# Altium PCB PCB_VS1005BOB-Pico-LCD_2024-02-10.pcbdoc
Units mil, origin at the board's own origin, x right, y up, seen from the top; angles counter-clockwise.
Board outline 5177.86 x 5854.5 mil, 2 copper layers (Top Layer, Bottom Layer); 38 components, 131 nets, 661 pads, 78 vias.
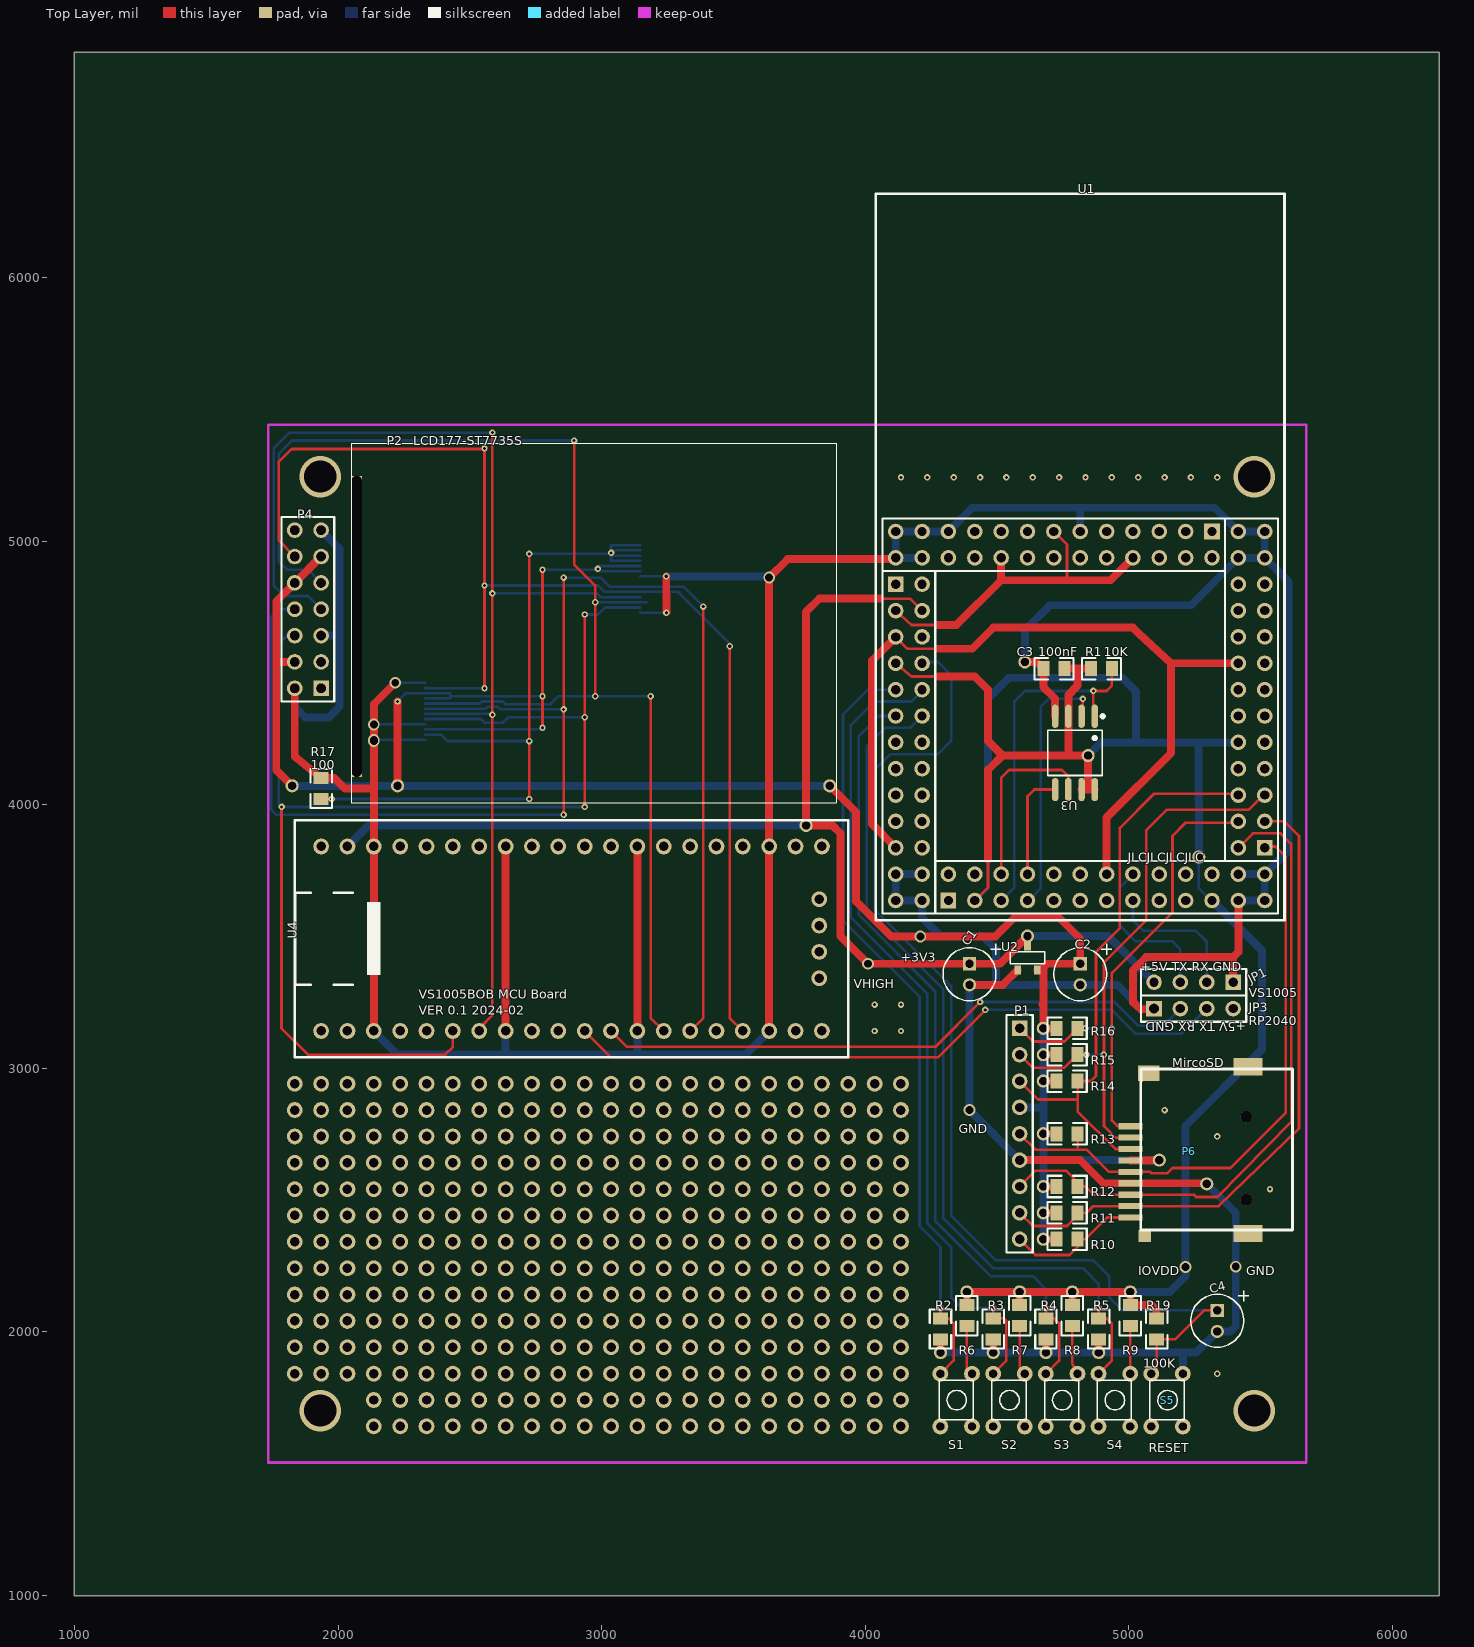
[diagram p0: Top Layer view]
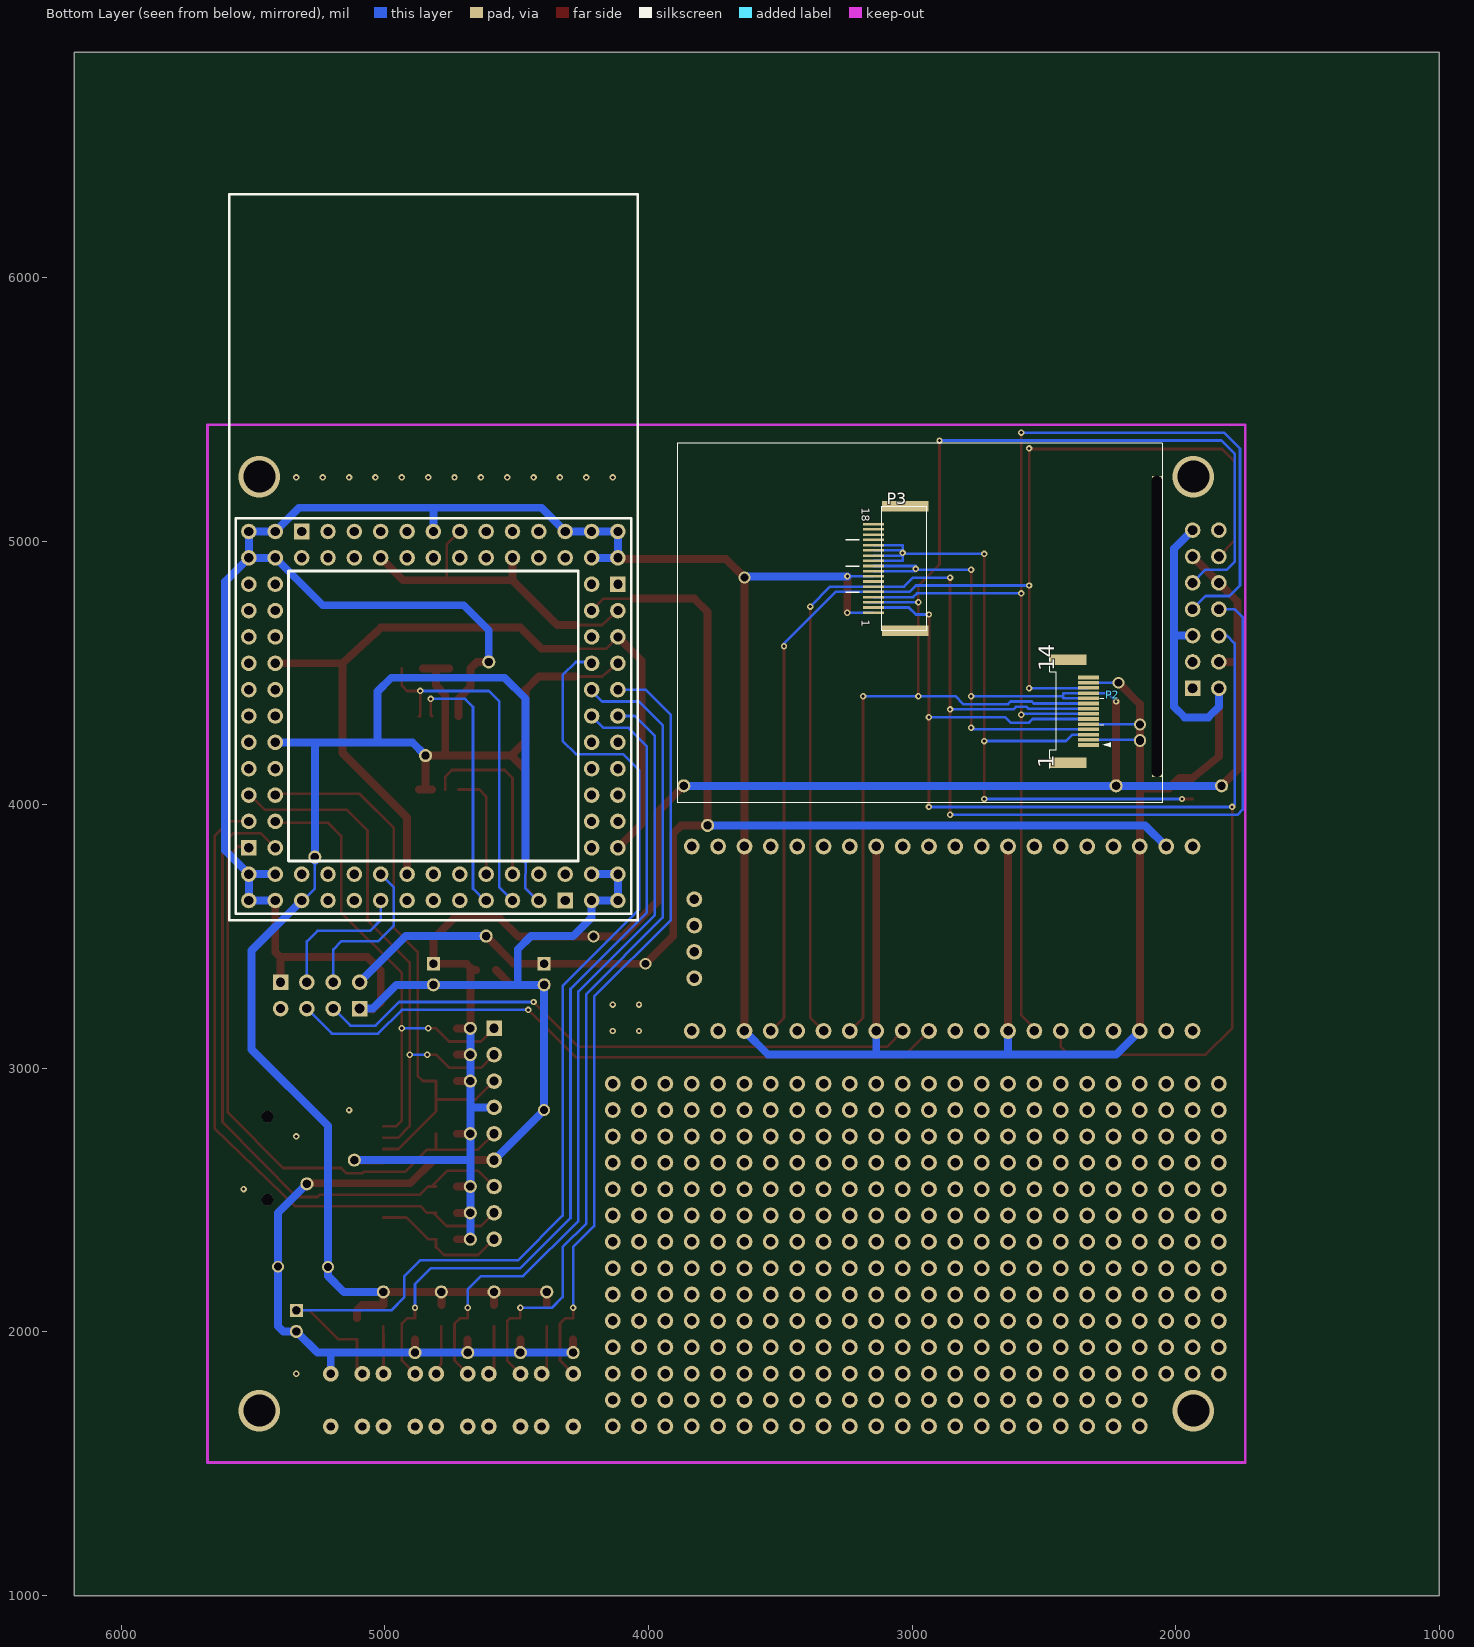
[diagram p1: Bottom Layer view, seen from below]

## Layer stack, top to bottom
Top Layer: signal copper (thickness not stored)
Dielectric: dielectric 12.6, FR-4, Dk 4.8
Bottom Layer: signal copper (thickness not stored)

## Board outline
6177.86,1000 1000,1000 1000,6854.5 6177.86,6854.5

## Components (designator, comment, footprint, x,y, rotation, side; value= is the part's Value field where it differs from the comment)
C1 "10uF" CAP-DIP 4395.86,3357 r270 top
C2 "10uF" CAP-DIP 4815.86,3357 r270 top
C3 "100nF" CAP-0805 4715.86,4517 r180 top
C4 "1uF" CAP-DIP 5335.86,2042 r270 top
JP1 "UART_VS10XX" HDR1X4#1 5395.86,3327 r180 top
JP3 "UART_PICO" HDR1X4#2 5095.86,3227 r0 top
P1 "Header 9" HDR1X9 4585.86,3152 r270 top
P2 "LCD177-ST7735S" LCD177-ST7735S 2435.86,4992 r270 top
P3 "LCD28-ST7789-HDR2X7" FPC18 3185.86,4642 r0 bottom
P4 "Header 7X2" HDR2X7 1935.86,4442 r90 top
P6 "MircoSD" MICROSD 5445.86,2502 r0 top
R1 "10K" RES-0805 4895.86,4517 r180 top
R2 "10K" RES-0805 4285.86,2012 r90 top
R3 "10K" RES-0805 4485.86,2012 r90 top
R4 "10K" RES-0805 4685.86,2012 r90 top
R5 "10K" RES-0805 4885.86,2012 r90 top
R6 "10K" RES-0805 4385.86,2062 r90 top
R7 "10K" RES-0805 4585.86,2062 r90 top
R8 "10K" RES-0805 4785.86,2062 r90 top
R9 "10K" RES-0805 5005.86,2062 r90 top
R10 "10K" RES-0805 4765.86,2352 r180 top
R11 "10K" RES-0805 4765.86,2452 r180 top
R12 "10K" RES-0805 4765.86,2552 r180 top
R13 "10K" RES-0805 4765.86,2752 r180 top
R14 "10K" RES-0805 4765.86,2952 r180 top
R15 "10K" RES-0805 4765.86,3052 r180 top
R16 "10K" RES-0805 4765.86,3152 r180 top
R17 "100" RES-0805 1935.86,4062 r270 top
R19 "100K" RES-0805 5105.86,2012 r90 top
S1 "UP" SW-4.5 4405.86,1842 r180 top
S2 "DOWN" SW-4.5 4605.86,1842 r180 top
S3 "D2" SW-4.5 4805.86,1842 r180 top
S4 "D3" SW-4.5 5005.86,1842 r180 top
S5 "RESET" SW-4.5 5205.86,1842 r180 top
U1 "VS1005BOB" VS1005BOB 4815.86,4337 r0 top
U2 "VOX6206" VOX6206 4615.86,3452 r0 top
U3 "GD25Q16CSIG" SOIC-8_L5.3-W5.3-P1.27-LS8.0-BL 4795.86,4197 r180 top
U4 "YD_RP2040" YD-RP2040 3435.86,3492 r90 top

## Footprints (in the part's own frame and the unit in brackets; to place one, negate y for a bottom-side part, rotate by r counter-clockwise, add the part's x,y. Pads: shape width x height; smd on the part's side, far side on the other; paste and mask are expansions set on the pad)
CAP-0805 [mm]
  rect 1.16x1.45 smd paste+0 mask+0.102: 1(-1.016,0) 2(1.016,0)
  silkscreen extent -1.9,-1.03 1.87,1.04
CAP-DIP [mil]
  rect 50x50 hole 30 slot 30.2 at 0 deg paste+0 mask+2: 1(-40,0)
  round 50 hole 30 slot 30.2 at 0 deg paste+0 mask+2: 2(40,0)
  silkscreen extent -115,-100 100,120
FPC18 [mm]
  rect 4.5x1.016 smd paste+0 mask+0.051: 0(-4.064,-12.446) 0(-4.064,-0.459)
  rect 2x0.25 smd paste+0 mask+0.051: 1(-1.004,-2.209) 2(-1.004,-2.709) 3(-1.004,-3.209) 4(-1.004,-3.709) 5(-1.004,-4.209) 6(-1.004,-4.709) 7(-1.004,-5.209) 8(-1.004,-5.709) 9(-1.004,-6.209) 10(-1.004,-6.709) 11(-1.004,-7.209) 12(-1.004,-7.709) 13(-1.004,-8.209) 14(-1.004,-8.709) 15(-1.004,-9.217) 16(-1.004,-9.725) 17(-1.004,-10.233) 18(-1.004,-10.741)
  silkscreen extent -6.07,-12.45 1.65,-0.46
HDR1X4#1 [mm]
  rect 1.5x1.5 hole 0.9 paste+0 mask+0.051: 1(0,0)
  round 1.5 hole 0.9 paste+0 mask+0.051: 2(2.54,0) 3(5.08,0) 4(7.62,0)
  silkscreen extent -1.27,-1.27 8.89,1.27
HDR1X4#2 [mm]
  rect 1.5x1.5 hole 0.9 slot 0.905 at 0 deg paste+0 mask+0.051: 1(0,0)
  round 1.5 hole 0.9 paste+0 mask+0.051: 2(2.54,0) 3(5.08,0) 4(7.62,0)
  silkscreen extent -1.27,-1.27 8.89,1.27
HDR1X9 [mm]
  rect 1.5x1.5 hole 0.9 paste+0 mask+0.051: 1(0,0)
  round 1.5 hole 0.9 paste+0 mask+0.051: 2(2.54,0) 3(5.08,0) 4(7.62,0) 5(10.16,0) 6(12.7,0) 7(15.24,0) 8(17.78,0) 9(20.32,0)
  silkscreen extent -1.27,-1.27 21.59,1.27
HDR2X7 [mm]
  rect 1.5x1.5 hole 0.9 slot 0.905 at 0 deg paste+0 mask+0.051: 1(0,0)
  round 1.5 hole 0.9 slot 0.905 at 0 deg paste+0 mask+0.051: 2(0,2.54) 3(2.54,0) 4(2.54,2.54) 5(5.08,0) 6(5.08,2.54) 7(7.62,0) 8(7.62,2.54) 9(10.16,0) 10(10.16,2.54) 11(12.7,0) 12(12.7,2.54) 13(15.24,0) 14(15.24,2.54)
  silkscreen extent -1.27,-1.27 16.51,3.81
LCD177-ST7735S [mm]
  rect 0.35x2 smd far side paste+0 mask+0.051: 1(19.431,-2.67) 2(18.931,-2.67) 3(18.431,-2.67) 4(17.931,-2.67) 5(17.431,-2.67) 6(16.931,-2.67) 7(16.431,-2.67) 8(15.931,-2.67) 9(15.431,-2.67) 10(14.931,-2.67) 11(14.431,-2.67) 12(13.931,-2.67) 13(13.431,-2.67) 14(12.931,-2.67)
  rect 1x3.5 smd far side paste+0 mask+0.051: 15(21.14,-0.728) 16(11.234,-0.728)
  rect 29x1 hole 1 slot 29 at 0 deg paste+0 mask+0.051: 17(8.001,-9.271)
  silkscreen extent -9.65,-9.78 25.02,36.96
MICROSD [mm]
  rect 2.35x0.6 smd paste+0 mask+0.051: 1(-11.163,7.079) 2(-11.163,5.979) 3(-11.163,4.879) 4(-11.163,3.779) 5(-11.163,2.679) 6(-11.163,1.579) 7(-11.163,0.479) 8(-11.163,-0.621) 9(-11.163,-1.721)
  round 1.092 hole 1.092 slot 1.097 at 0 deg paste+0 mask+0.051: 10(-0.013,0) 11(-0.013,8.001)
  rect 2.794x1.651 smd paste+0 mask+0.051: GND(0.167,-3.251) GND(0.167,12.809)
  rect 1.2x1.2 smd paste+0 mask+0.051: ""(-9.8,-3.5)
  rect 2.032x1.5 smd paste+0 mask+0.051: ""(-9.4,12.2)
  silkscreen extent -10.17,-2.92 4.46,12.59
RES-0805 [mm]
  rect 1.16x1.45 smd paste+0 mask+0.102: 1(-1.016,0) 2(1.016,0)
  silkscreen extent -1.9,-1.03 1.87,1.04
SOIC-8_L5.3-W5.3-P1.27-LS8.0-BL [mm]
  oval 0.63x2.25 smd paste+0 mask+0.051: 1(-1.905,-3.53) 2(-0.635,-3.53) 3(0.635,-3.53) 4(1.905,-3.53) 5(1.905,3.53) 6(0.635,3.53) 7(-0.635,3.53) 8(-1.905,3.53)
  silkscreen extent -2.82,-3.68 2.64,2.18
SW-4.5 [mil]
  round 60 hole 30 slot 30.2 at 0 deg paste+0 mask+2: 1(0.5,0.5) 2(120.5,0.5) 3(0.5,200.5) 4(120.5,200.5)
  silkscreen extent -5,26 126,176
VOX6206 [mil]
  rect 25x35 smd paste+0 mask+2: 1(-37.4,-78.74) 2(37.4,-78.74)
  rect 25x40 smd paste+0 mask+2: 3(0,15)
  silkscreen extent -65,-55 65,-10
VS1005BOB [mm]
  rect 1.5x1.5 hole 0.9 paste+0 mask+0.051: 1-1(12.7,17.78) 2-1(-17.78,12.7) 3-1(17.78,-12.7) 4-1(-12.7,-17.78)
  round 1.5 hole 0.9 paste+0 mask+0.051: 1-2(12.7,15.24) 1-3(10.16,17.78) 1-4(10.16,15.24) 1-5(7.62,17.78) 1-6(7.62,15.24) 1-7(5.08,17.78) 1-8(5.08,15.24) 1-9(2.54,17.78) 1-10(2.54,15.24) 1-11(0,17.78) 1-12(0,15.24) 1-13(-2.54,17.78) 1-14(-2.54,15.24) 1-15(-5.08,17.78) 1-16(-5.08,15.24) 1-17(-7.62,17.78) 1-18(-7.62,15.24) 1-19(-10.16,17.78) 1-20(-10.16,15.24) 1-21(-12.7,17.78) 1-22(-12.7,15.24) 1-23(-15.24,17.78) 1-24(-15.24,15.24) 1-25(-17.78,17.78) 1-26(-17.78,15.24) 2-2(-15.24,12.7) 2-3(-17.78,10.16) 2-4(-15.24,10.16) 2-5(-17.78,7.62) 2-6(-15.24,7.62) 2-7(-17.78,5.08) 2-8(-15.24,5.08) 2-9(-17.78,2.54) 2-10(-15.24,2.54) 2-11(-17.78,0) 2-12(-15.24,0) 2-13(-17.78,-2.54) 2-14(-15.24,-2.54) 2-15(-17.78,-5.08) 2-16(-15.24,-5.08) 2-17(-17.78,-7.62) 2-18(-15.24,-7.62) 2-19(-17.78,-10.16) 2-20(-15.24,-10.16) 2-21(-17.78,-12.7) 2-22(-15.24,-12.7) 2-23(-17.78,-15.24) 2-24(-15.24,-15.24) 2-25(-17.78,-17.78) 2-26(-15.24,-17.78) 3-2(15.24,-12.7) 3-3(17.78,-10.16) 3-4(15.24,-10.16) 3-5(17.78,-7.62) 3-6(15.24,-7.62) 3-7(17.78,-5.08) 3-8(15.24,-5.08) 3-9(17.78,-2.54) 3-10(15.24,-2.54) 3-11(17.78,0) 3-12(15.24,0) 3-13(17.78,2.54) 3-14(15.24,2.54) 3-15(17.78,5.08) 3-16(15.24,5.08) 3-17(17.78,7.62) 3-18(15.24,7.62) 3-19(17.78,10.16) 3-20(15.24,10.16) 3-21(17.78,12.7) 3-22(15.24,12.7) 3-23(17.78,15.24) 3-24(15.24,15.24) 3-25(17.78,17.78) 3-26(15.24,17.78) 4-2(-12.7,-15.24) 4-3(-10.16,-17.78) 4-4(-10.16,-15.24) 4-5(-7.62,-17.78) 4-6(-7.62,-15.24) 4-7(-5.08,-17.78) 4-8(-5.08,-15.24) 4-9(-2.54,-17.78) 4-10(-2.54,-15.24) 4-11(0,-17.78) 4-12(0,-15.24) 4-13(2.54,-17.78) 4-14(2.54,-15.24) 4-15(5.08,-17.78) 4-16(5.08,-15.24) 4-17(7.62,-17.78) 4-18(7.62,-15.24) 4-19(10.16,-17.78) 4-20(10.16,-15.24) 4-21(12.7,-17.78) 4-22(12.7,-15.24) 4-23(15.24,-17.78) 4-24(15.24,-15.24) 4-25(17.78,-17.78) 4-26(17.78,-15.24)
  silkscreen extent -19.69,-19.68 19.68,50.31
YD-RP2040 [mil]
  round 60 hole 36 paste+0 mask+2: 1(-350,1500) 2(-350,1400) 3(-350,1300) 4(-350,1200) 5(-350,1100) 6(-350,1000) 7(-350,900) 8(-350,800) 9(-350,700) 10(-350,600) 11(-350,500) 12(-350,400) 13(-350,300) 14(-350,200) 15(-350,100) 16(-350,0) 17(-350,-100) 18(-350,-200) 19(-350,-300) 20(-350,-400) 21(350,-400) 22(350,-300) 23(350,-200) 24(350,-100) 25(350,0) 26(350,100) 27(350,200) 28(350,300) 29(350,400) 30(350,500) 31(350,600) 32(350,700) 33(350,800) 34(350,900) 35(350,1000) 36(350,1100) 37(350,1200) 38(350,1300) 39(350,1400) 40(350,1500) 41(-150,-390) 42(-50,-390) 43(50,-390) 44(150,-390)
  silkscreen extent -450,-500 450,1600

## Free pads (board coordinates)
  round 60 hole 36 paste+0 mask+2: 1(1835.86,1842) 1(1835.86,1942) 1(1835.86,2042) 1(1835.86,2142) 1(1835.86,2242) 1(1835.86,2342) 1(1835.86,2442) 1(1835.86,2542) 1(1835.86,2642) 1(1835.86,2742) 1(1835.86,2842) 1(1835.86,2942) 1(1935.86,1842) 1(1935.86,1942) 1(1935.86,2042) 1(1935.86,2142) 1(1935.86,2242) 1(1935.86,2342) 1(1935.86,2442) 1(1935.86,2542) 1(1935.86,2642) 1(1935.86,2742) 1(1935.86,2842) 1(1935.86,2942) 1(2035.86,1842) 1(2035.86,1942) 1(2035.86,2042) 1(2035.86,2142) 1(2035.86,2242) 1(2035.86,2342) 1(2035.86,2442) 1(2035.86,2542) 1(2035.86,2642) 1(2035.86,2742) 1(2035.86,2842) 1(2035.86,2942) 1(2135.86,1642) 1(2135.86,1742) 1(2135.86,1842) 1(2135.86,1942) 1(2135.86,2042) 1(2135.86,2142) 1(2135.86,2242) 1(2135.86,2342) 1(2135.86,2442) 1(2135.86,2542) 1(2135.86,2642) 1(2135.86,2742) 1(2135.86,2842) 1(2135.86,2942) 1(2235.86,1642) 1(2235.86,1742) 1(2235.86,1842) 1(2235.86,1942) 1(2235.86,2042) 1(2235.86,2142) 1(2235.86,2242) 1(2235.86,2342) 1(2235.86,2442) 1(2235.86,2542) 1(2235.86,2642) 1(2235.86,2742) 1(2235.86,2842) 1(2235.86,2942) 1(2335.86,1642) 1(2335.86,1742) 1(2335.86,1842) 1(2335.86,1942) 1(2335.86,2042) 1(2335.86,2142) 1(2335.86,2242) 1(2335.86,2342) 1(2335.86,2442) 1(2335.86,2542) 1(2335.86,2642) 1(2335.86,2742) 1(2335.86,2842) 1(2335.86,2942) 1(2435.86,1642) 1(2435.86,1742) 1(2435.86,1842) 1(2435.86,1942) 1(2435.86,2042) 1(2435.86,2142) 1(2435.86,2242) 1(2435.86,2342) 1(2435.86,2442) 1(2435.86,2542) 1(2435.86,2642) 1(2435.86,2742) 1(2435.86,2842) 1(2435.86,2942) 1(2535.86,1642) 1(2535.86,1742) 1(2535.86,1842) 1(2535.86,1942) 1(2535.86,2042) 1(2535.86,2142) 1(2535.86,2242) 1(2535.86,2342) 1(2535.86,2442) 1(2535.86,2542) 1(2535.86,2642) 1(2535.86,2742) 1(2535.86,2842) 1(2535.86,2942) 1(2635.86,1642) 1(2635.86,1742) 1(2635.86,1842) 1(2635.86,1942) 1(2635.86,2042) 1(2635.86,2142) 1(2635.86,2242) 1(2635.86,2342) 1(2635.86,2442) 1(2635.86,2542) 1(2635.86,2642) 1(2635.86,2742) 1(2635.86,2842) 1(2635.86,2942) 1(2735.86,1642) 1(2735.86,1742) 1(2735.86,1842) 1(2735.86,1942) 1(2735.86,2042) 1(2735.86,2142) 1(2735.86,2242) 1(2735.86,2342) 1(2735.86,2442) 1(2735.86,2542) 1(2735.86,2642) 1(2735.86,2742) 1(2735.86,2842) 1(2735.86,2942) 1(2835.86,1642) 1(2835.86,1742) 1(2835.86,1842) 1(2835.86,1942) 1(2835.86,2042) 1(2835.86,2142) 1(2835.86,2242) 1(2835.86,2342) 1(2835.86,2442) 1(2835.86,2542) 1(2835.86,2642) 1(2835.86,2742) 1(2835.86,2842) 1(2835.86,2942) 1(2935.86,1642) 1(2935.86,1742) 1(2935.86,1842) 1(2935.86,1942) 1(2935.86,2042) 1(2935.86,2142) 1(2935.86,2242) 1(2935.86,2342) 1(2935.86,2442) 1(2935.86,2542) 1(2935.86,2642) 1(2935.86,2742) 1(2935.86,2842) 1(2935.86,2942) 1(3035.86,1642) 1(3035.86,1742) 1(3035.86,1842) 1(3035.86,1942) 1(3035.86,2042) 1(3035.86,2142) 1(3035.86,2242) 1(3035.86,2342) 1(3035.86,2442) 1(3035.86,2542) 1(3035.86,2642) 1(3035.86,2742) 1(3035.86,2842) 1(3035.86,2942) 1(3135.86,1642) 1(3135.86,1742) 1(3135.86,1842) 1(3135.86,1942) 1(3135.86,2042) 1(3135.86,2142) 1(3135.86,2242) 1(3135.86,2342) 1(3135.86,2442) 1(3135.86,2542) 1(3135.86,2642) 1(3135.86,2742) 1(3135.86,2842) 1(3135.86,2942) 1(3235.86,1642) 1(3235.86,1742) 1(3235.86,1842) 1(3235.86,1942) 1(3235.86,2042) 1(3235.86,2142) 1(3235.86,2242) 1(3235.86,2342) 1(3235.86,2442) 1(3235.86,2542) 1(3235.86,2642) 1(3235.86,2742) 1(3235.86,2842) 1(3235.86,2942) 1(3335.86,1642) 1(3335.86,1742) 1(3335.86,1842) 1(3335.86,1942) 1(3335.86,2042) 1(3335.86,2142) 1(3335.86,2242) 1(3335.86,2342) 1(3335.86,2442) 1(3335.86,2542) 1(3335.86,2642) 1(3335.86,2742) 1(3335.86,2842) 1(3335.86,2942) 1(3435.86,1642) 1(3435.86,1742) 1(3435.86,1842) 1(3435.86,1942) 1(3435.86,2042) 1(3435.86,2142) 1(3435.86,2242) 1(3435.86,2342) 1(3435.86,2442) 1(3435.86,2542) 1(3435.86,2642) 1(3435.86,2742) 1(3435.86,2842) 1(3435.86,2942) 1(3535.86,1642) 1(3535.86,1742) 1(3535.86,1842) 1(3535.86,1942) 1(3535.86,2042) 1(3535.86,2142) 1(3535.86,2242) 1(3535.86,2342) 1(3535.86,2442) 1(3535.86,2542) 1(3535.86,2642) 1(3535.86,2742) 1(3535.86,2842) 1(3535.86,2942) 1(3635.86,1642) 1(3635.86,1742) 1(3635.86,1842) 1(3635.86,1942) 1(3635.86,2042) 1(3635.86,2142) 1(3635.86,2242) 1(3635.86,2342) 1(3635.86,2442) 1(3635.86,2542) 1(3635.86,2642) 1(3635.86,2742) 1(3635.86,2842) 1(3635.86,2942) 1(3735.86,1642) 1(3735.86,1742) 1(3735.86,1842) 1(3735.86,1942) 1(3735.86,2042) 1(3735.86,2142) 1(3735.86,2242) 1(3735.86,2342) 1(3735.86,2442) 1(3735.86,2542) 1(3735.86,2642) 1(3735.86,2742) 1(3735.86,2842) 1(3735.86,2942) 1(3835.86,1642) 1(3835.86,1742) 1(3835.86,1842) 1(3835.86,1942) 1(3835.86,2042) 1(3835.86,2142) 1(3835.86,2242) 1(3835.86,2342) 1(3835.86,2442) 1(3835.86,2542) 1(3835.86,2642) 1(3835.86,2742) 1(3835.86,2842) 1(3835.86,2942) 1(3935.86,1642) 1(3935.86,1742) 1(3935.86,1842) 1(3935.86,1942) 1(3935.86,2042) 1(3935.86,2142) 1(3935.86,2242) 1(3935.86,2342) 1(3935.86,2442) 1(3935.86,2542) 1(3935.86,2642) 1(3935.86,2742) 1(3935.86,2842) 1(3935.86,2942) 1(4035.86,1642) 1(4035.86,1742) 1(4035.86,1842) 1(4035.86,1942) 1(4035.86,2042) 1(4035.86,2142) 1(4035.86,2242) 1(4035.86,2342) 1(4035.86,2442) 1(4035.86,2542) 1(4035.86,2642) 1(4035.86,2742) 1(4035.86,2842) 1(4035.86,2942) 1(4135.86,1642) 1(4135.86,1742) 1(4135.86,1842) 1(4135.86,1942) 1(4135.86,2042) 1(4135.86,2142) 1(4135.86,2242) 1(4135.86,2342) 1(4135.86,2442) 1(4135.86,2542) 1(4135.86,2642) 1(4135.86,2742) 1(4135.86,2842) 1(4135.86,2942)
  round 50 hole 30 slot 30.2 at 0 deg paste+0 mask+2: 2(1825.86,4072) 2(2225.86,4072) 2(3775.86,3922) 2(3865.86,4072) 2(4285.86,1922) 2(4385.86,2152) 2(4485.86,1922) 2(4585.86,2152) 2(4605.86,4542) 2(4615.86,3502) 2(4675.86,2352) 2(4675.86,2452) 2(4675.86,2552) 2(4675.86,2752) 2(4675.86,2952) 2(4675.86,3052) 2(4675.86,3152) 2(4685.86,1922) 2(4785.86,2152) 2(4845.86,4187) 2(4885.86,1922) 2(5005.86,2152) 2(5115.86,2652) 2(5265.86,3802) 2(5295.86,2562)

## Via types
v1: diameter 24.41, hole 12.2, Top Layer to Bottom Layer, tented both sides, 64 vias
v2: diameter 45, hole 30, Top Layer to Bottom Layer, tented both sides, 10 vias
v3: diameter 157.48, hole 122.05, Top Layer to Bottom Layer, tented both sides, 4 vias

## Nets (pads, with @x,y where several pads share a name; then routed paths per layer and width w, separated by ;. In a path a pad name is that pad's centre, name@x,y a point inside that pad or via, vN(x,y) a via of type N, cw(c..) or ccw(c..) an arc to the next point about the centre after c; other vN are vias at no path point)
+3V3: C2.1 P1.4 P2.4 P2.10 P2.11 P3.9 P3.10 P4.4 P4.10 P4.11 P6.4 pad.2@1825.86,4072 pad.2@2225.86,4072 pad.2@3865.86,4072 pad.2@4675.86,2352 pad.2@4675.86,2452 pad.2@4675.86,2552 pad.2@4675.86,2752 pad.2@4675.86,2952 pad.2@4675.86,3052 pad.2@4675.86,3152 pad.2@5115.86,2652 R10.2 R11.2 R12.2 R13.2 R14.2 R15.2 R16.2 U2.2 | length 9634.6
  Top Layer w10: v1(2775.86,4292) v1(2775.86,4412) ; v1@2775.86,4409.02 v1(2775.86,4892)
  Top Layer w30: pad.2@1825.86,4072 1765.86,4132 1765.86,4542 ; P4.4 1815.86,4542 1765.86,4542 ; P4.11 P4.10 1765.86,4772 1765.86,4542 ; pad.2@2225.86,4072 v1(2225.86,4392) ; pad.2@3865.86,4072 3965.86,3972 3965.86,3633 4098.86,3500 v2(4209.13,3500) 4493.86,3500 4565.86,3572 4735.86,3572 4815.86,3492 C2.1 4690.86,3397 4675.86,3382 4675.86,3152 R16.2 ; U2.2 4675.86,3373.3 4675.86,3257 ; 4673.36,3242 4675.86,3239.5 ; pad.2@4675.86,2352 R10.2 ; pad.2@4675.86,2452 R11.2 ; pad.2@4675.86,2552 R12.2 ; pad.2@4675.86,2752 R13.2 ; pad.2@4675.86,2952 R14.2 ; pad.2@4675.86,3052 R15.2 ; P6.4 5114.64,2650.78 pad.2@5115.86,2652
  Bottom Layer w10: v1(2225.86,4392) 2255.86,4422 2255.86,4423.87 P2.11 ; P2.4 2425.86,4286.07 v1@2775.86,4286.07 ; P2.10 2425.86,4404.18 2425.86,4414.98 ; P2.11@2355.93,4423.87 P2.11 ; v1(2775.86,4412) 2428.86,4412 2425.86,4415 ; v1(2775.86,4892) 2985.86,4892 v1(2985.86,4894.98) ; P3.9 2985.86,4886.46 v1(2985.86,4894.98) ; P3.10 2985.86,4906.15 v1(2985.86,4894.98) ; P2.11 2425.86,4423.87 2425.86,4414.98
  Bottom Layer w30: pad.2@1825.86,4072 pad.2@2225.86,4072 ; pad.2@2220.86,4072 pad.2@3865.86,4072 ; P1.4 4675.86,2852 pad.2@4675.86,2752 ; 4675.86,2377 4675.86,3052 pad.2@4675.86,3152 ; 4675.86,2652 pad.2@5115.86,2652
AVDD: U1.1-8 U1.1-13 U1.1-18 U1.2-3 | length 1402.7
  Top Layer w10: U1.2-3 4175.86,4682 4275.86,4682 ; U1.1-13 4765.86,4987 4765.86,4852
  Top Layer w30: 4275.86,4682 4345.86,4682 4515.86,4852 ; U1.1-8 4930.86,4852 4765.86,4852 4515.86,4852 ; 4515.86,4852 U1.1-18 4515.86,4852
CMD: P1.3 P6.3 R14.1 U1.3-6 | length 2211.8
  Top Layer w10: P1.3 4655.86,2882 4805.86,2882 4805.86,2908.8 ; P6.3 4949.12,2694.09 4805.86,2837.34 4805.86,2908.81 ; U1.3-6 5410.86,4042 5095.86,4042 4965.86,3912 4965.86,3532 4875.86,3442 4875.86,2972 4855.86,2952 R14.1 4805.86,2908.81
CS: P2.12 P3.5 P4.12 U4.17 | length 4837.4
  Top Layer w10: P4.12 1775.86,5002 1775.86,5302 1823.76,5349.9 v1@2557.96,5349.9 ; v1(2555.86,4442) v1(2555.86,4832) v1(2555.86,5352) ; v1(3485.86,4602) 3485.86,3192 U4.17
  Bottom Layer w10: P2.12 2332.3,4442 v1(2555.86,4442) ; v1(2555.86,4832) 2985.86,4832 3010.17,4808 3146.36,4808 3289.86,4808 3485.86,4612 v1(3485.86,4602) ; P3.5@3143.27,4807.72 P3.5
CVDD: U1.2-5 U1.2-21 U1.3-16 U1.4-14 | length 3181
  Top Layer w10: U1.2-5 4160.86,4592 4275.86,4592
  Top Layer w30: U1.2-21 4025.86,3927 4025.86,4547 U1.2-5 ; 4275.86,4592 4405.86,4592 4485.86,4672 5015.86,4672 5035.86,4652 5160.86,4537 ; U1.4-14 4915.86,3952 5160.86,4197 5160.86,4537 ; U1.3-16 5160.86,4537
D0: R2.2 S1.2 U1.2-9 | length 2952.3
  Top Layer w10: S1.2 4335.86,1892 4335.86,2032 4315.86,2052 R2.2 v1(4285.86,2092)
  Bottom Layer w10: U1.2-9 4010.86,4437 3915.86,4342 3915.86,3562 4205.86,3272 4205.86,2402 4285.86,2322 v1(4285.86,2092)
D1: R3.2 S2.2 U1.2-10 | length 3187.9
  Top Layer w10: S2.2 4535.86,1892 4535.86,2042 4525.86,2052 R3.2 ; v1(4485.86,2092) R3.2 ; 4525.41,2052 R3.2
  Bottom Layer w10: U1.2-10 4215.86,4432 4175.86,4392 4035.86,4392 3945.86,4302 3945.86,3572 4235.86,3282 4235.86,2412 4325.86,2322 4325.86,2132 4365.86,2092 v1(4485.86,2092)
D2: R4.2 S3.2 U1.2-11 | length 3038.6
  Top Layer w10: S3.2 4735.86,1892 4735.86,2032 4715.86,2052 R4.2 v1(4685.86,2092)
  Bottom Layer w10: U1.2-11 4050.86,4337 3975.86,4262 3975.86,3582 4265.86,3292 4265.86,2422 4475.86,2212 4635.86,2212 4685.86,2162 v1(4685.86,2092)
D3: R5.2 S4.2 U1.2-12 | length 3261
  Top Layer w10: S4.2 4935.86,1892 4935.86,2032 4915.86,2052 R5.2 v1(4885.86,2092)
  Bottom Layer w10: U1.2-12 4170.86,4292 4075.86,4292 4005.86,4222 4005.86,3592 4295.86,3302 4295.86,2432 4485.86,2242 4825.86,2242 4885.86,2182 v1(4885.86,2092)
DC: P2.7 P3.4 P4.7 U4.7 | length 4705.5
  Top Layer w10: U4.7 2535.86,3152 2585.86,3202 v1(2585.86,4342) v1(2585.86,4802) v1(2585.86,5412)
  Bottom Layer w10: P4.7 1885.86,4792 1795.86,4792 1755.86,4832 1755.86,5352 1815.86,5412 v1(2585.86,5412) ; P2.7@2330.76,4345.1 2582.76,4345.1 v1(2585.86,4342) ; v1(2585.86,4802) 2981.86,4802 2995.86,4788 P3.4@3146.36,4788
GND: C1.2 C2.2 C3.2 C4.2 JP1.1 JP3.1 P1.6 P2.2 P2.5 P2.13 P3.1 P3.8 P4.2 P4.5 P4.13 P6.6 pad.2@4285.86,1922 pad.2@4485.86,1922 pad.2@4605.86,4542 pad.2@4685.86,1922 pad.2@4885.86,1922 pad.2@5295.86,2562 R2.1 R3.1 R4.1 R5.1 R17.1 S5.1 U1.1-11 U1.1-21 U1.1-23 U1.1-24 U1.1-25 U1.1-26 U1.2-23 U1.2-24 U1.2-25 U1.2-26 U1.3-23 U1.3-24 U1.3-25 U1.3-26 U1.4-23 U1.4-24 U1.4-25 U1.4-26 U2.1 U3.4 U4.3 U4.8 U4.13 U4.18 U4.23 U4.28 U4.33 U4.38 | length 21714.1
  Top Layer w10: pad.2@4285.86,1922 R2.1 ; pad.2@4485.86,1922 R3.1 ; pad.2@4685.86,1922 R4.1 ; pad.2@4885.86,1922 R5.1
  Top Layer w30: P4.2 1835.86,4182.9 R17.1 1985.86,4102 2025.86,4062 2135.86,4062 v2(2135.86,4242) ; U4.3 U4.38 v2(2135.86,4242) ; v2@2135.86,4243.33 v2@2135.86,4302 ; v2(2135.86,4245.71) v2(2135.86,4242) ; v2(2135.86,4304.38) 2135.86,4382 v2(2217.06,4463.2) ; U4.8 U4.33 ; U4.13 U4.28 ; v1(3245.15,4866.8) v1@3245.86,4732 ; U4.18 U4.23 v2(3635.86,4862) 3705.86,4932 4110.86,4932 U1.1-26 ; pad.2@4285.86,1922 R2.1 ; C1.2 4522.16,3317 U2.1 ; pad.2@4485.86,1922 R3.1 ; P1.6 4815.86,2652 4903.66,2564.2 P6.6 5293.7,2564.17 pad.2@5295.86,2562 ; pad.2@4605.86,4542 4650.86,4542 C3.2 4675.86,4447 4720.86,4402 U3.4 ; pad.2@4685.86,1922 R4.1 ; pad.2@4885.86,1922 R5.1 ; JP3.1 5046.76,3223.7 5015.86,3250.7 5015.86,3372 5065.86,3422 5395.86,3422 ; JP1.1 5395.86,3422 ; U1.4-23 5415.86,3442 5395.86,3422
  Bottom Layer w10: v2@2135.86,4246.7 P2.2@2330.76,4246.7 ; v2@2135.86,4305.8 P2.5@2330.76,4305.8 ; v2(2217.06,4463.2) P2.13@2330.76,4463.2 ; P3.1@3146.36,4729 v1(3245.86,4729) v1@3245.86,4732 ; P3.8@3146.36,4866.8 v1(3245.15,4866.8)
  Bottom Layer w30: P4.2 1835.86,4372 1875.86,4332 1965.86,4332 2005.86,4372 2005.86,4712 ; P4.5 2005.86,4642 2005.86,4972 P4.13 ; U4.3 2225.86,3052 2635.86,3052 ; v1(3245.15,4866.8) 3631.06,4866.8 v2(3635.86,4862) ; U4.18 3545.86,3052 3135.86,3052 ; U1.2-24 U1.2-23 U1.2-25 U1.2-26 4215.86,3572 4285.86,3502 4445.86,3502 4495.86,3452 4495.86,3317 C1.2 ; U1.1-24 U1.1-26 U1.1-25 U1.1-23 U1.1-21 4405.86,5127 4815.86,5127 ; pad.2@4285.86,1922 4485.86,1922 4685.86,1922 4885.86,1922 5205.36,1922 ; P1.6 v2(4395.86,2842) C1.2 ; pad.2@4605.86,4542 4605.86,4662 4700.86,4757 5235.86,4757 U1.3-24 ; JP3.1 5045.86,3227 4955.86,3317 C2.2 C1.2 ; S5.1 5205.36,1922 ; pad.2@5295.86,2562 5405.86,2452 v2(5405.86,2247.75) 5405.86,2022 5385.76,2002 C4.2 5255.96,1922 5205.36,1922 ; U1.4-23 U1.4-25 U1.4-26 ; U1.4-24 U1.4-26 ; U1.3-23@5505.86,4937 U1.3-24 ; 2635.86,3052 U4.8 2635.86,3052 ; 2635.86,3052 3135.86,3052 ; 3135.86,3052 U4.13 3135.86,3052 ; 4815.86,5127 U1.1-11 4815.86,5127 ; 4815.86,5127 5325.86,5127 U1.3-26 ; U1.3-24 U1.3-23 ; U1.3-26 U1.3-25 ; U1.3-26 U1.3-25 ; U1.4-26 5605.86,3827 5605.86,4847 U1.3-23 ; U1.3-23 U1.3-25
  other v1: 5335.86,1842 5535.86,2542 5335.86,2742 5135.86,2842 4035.86,3142 4135.86,3142 4035.86,3242 4135.86,3242 4135.86,5242 4235.86,5242 4335.86,5242 4435.86,5242 4535.86,5242 4635.86,5242 4735.86,5242 4835.86,5242 4935.86,5242 5035.86,5242 5135.86,5242 5235.86,5242 5335.86,5242
IOVDD: C3.1 pad.2@4385.86,2152 pad.2@4585.86,2152 pad.2@4785.86,2152 pad.2@4845.86,4187 pad.2@5005.86,2152 pad.2@5265.86,3802 R1.2 R6.2 R7.2 R8.2 R9.2 R19.2 U1.2-7 U1.3-10 U1.4-3 U1.4-21 U3.3 U3.7 U3.8 | length 8273.4
  Top Layer w10: U1.2-7 4175.86,4487 4285.86,4487 ; U1.4-3 4465.86,3687 4465.86,3792 ; R9.2 R9.2@5005.86,2118.93
  Top Layer w30: 4278.86,4487 4415.86,4487 4465.86,4437 4465.86,4242 4520.86,4187 ; R6.2 4385.86,2152 pad.2@4585.86,2152 ; 4465.86,3792 4465.86,4134.5 4468.36,4134.5 4520.86,4187 ; R7.2 pad.2@4585.86,2152 ; 4770.86,4187 U3.3 4770.86,4417 4805.86,4452.5 4805.86,4517 C3.1 R1.2 ; R8.2 pad.2@4785.86,2152 ; U3.7 U3.8 4845.86,4058 pad.2@4845.86,4187 ; R19.2 5105.86,2082 5085.86,2102 R9.2 5005.86,2152 pad.2@4785.86,2152 ; 4520.86,4187 pad.2@4845.86,4187 ; 4520.86,4187 pad.2@4845.86,4187 ; pad.2@4585.86,2152 pad.2@4785.86,2152
  Bottom Layer w10: U1.4-3 4420.86,3637 4466.86,3683 4465.86,3792 ; pad.2@5265.86,3802 5265.86,3682 5310.86,3637 U1.4-21
  Bottom Layer w30: 4465.86,3792 4465.86,4402 4545.86,4482 4975.86,4482 5027.66,4430.2 5027.66,4237 ; pad.2@4845.86,4187 4895.86,4237 U1.3-10 ; pad.2@5005.86,2152 5155.86,2152 5215.86,2212 v2(5215.86,2247.01) 5215.86,2782 5505.86,3072 5505.86,3447 U1.4-21 ; 5264.53,4237 pad.2@5265.86,3787.33
JP1_2: JP1.2 U1.4-15 | length 543.1
  Bottom Layer w10: U1.4-15 5015.86,3562.1 5055.96,3522 5255.86,3522 5295.86,3482 JP1.2
JP1_3: JP1.3 U1.4-16 | length 608
  Bottom Layer w10: U1.4-16 4965.86,3687 4965.86,3542 5025.86,3482 5165.86,3482 5195.86,3452 JP1.3
JP3_4: JP3.4
MISO0: U1.4-7 U3.2 | length 1001.2
  Top Layer w10: U3.2 4825.86,4340.98 v1(4825.86,4402)
  Bottom Layer w10: U1.4-7@4615.86,3632 4665.86,3682 4665.86,4372 4695.86,4402 v1(4825.86,4402)
MOSI0: U1.4-8 U3.5 | length 410.8
  Top Layer w10: U1.4-8 4615.86,4032 4641.86,4058 U3.5
MOSI1: P2.8 P3.6 P4.8 U4.15 | length 5589.2
  Top Layer w10: v1(2855.86,3962) v1(2855.86,4362) v1(2855.86,4862) ; U4.15 3385.86,3192 v1(3385.86,4752)
  Bottom Layer w10: P4.8 1775.86,4742 1745.86,4712 1745.86,3982 1765.86,3962 v1(2855.86,3962) ; P2.8@2330.76,4364.8 2558.66,4364.8 2565.86,4372 2605.86,4372 2615.86,4362 v1(2855.86,4362) ; v1(2855.86,4862) 2995.86,4862 3030.45,4827.41 P3.6 ; P3.6@3146.36,4827.4 3310.46,4827.4 v1(3385.86,4752)
P2_1: P2.1
P2_14: P2.14
P3_7: P3.7
P3_15: P3.15
P3_16: P3.16
P3_17: P3.17
P3_18: P3.18
P4_1: P4.1
P4_3: P4.3
P4_14: P4.14
PICO-RX: JP3.2 U4.12 | length 2319.5
  Top Layer w10: U4.12 3095.86,3082 4265.86,3082 v1(4435.86,3252)
  Bottom Layer w10: v1(4435.86,3252) 4945.86,3252 5035.86,3162 5130.86,3162 JP3.2
PICO-TX: JP3.3 U4.11 | length 2552.6
  Top Layer w10: U4.11 3035.86,3042 4275.86,3042 v1(4455.86,3222)
  Bottom Layer w10: v1(4455.86,3222) 4935.86,3222 5025.86,3132 5200.86,3132 JP3.3
R6_1: R6.1 S1.1 | length 188.6
  Top Layer w10: R6.1 4385.86,1861 S1.1
R7_1: R7.1 S2.1 | length 188.6
  Top Layer w10: R7.1 4585.86,1861 S2.1
R8_1: R8.1 S3.1 | length 185
  Top Layer w10: R8.1 4785.86,1882 S3.1
R9_1: R9.1 S4.1 | length 180.7
  Top Layer w10: S4.1 5005.37,1987.66 5005.86,1988.16 R9.1
R17_2: P2.3 P3.11 P3.12 P3.13 P3.14 R17.2 | length 2941.5
  Top Layer w10: R17.2 v1(1975.86,4022) ; v1(2725.86,4022) v1(2725.86,4242) ; v1@2725.86,4238.23 v1(2725.86,4952)
  Bottom Layer w10: v1(1975.86,4022) v1(2725.86,4022) ; P2.3 2391.47,4266.39 2415.86,4242 v1(2725.86,4242) ; v1(2725.86,4952) 3032.09,4952 v1(3035.86,4955.77) ; v1@3035.86,4945.52 P3.12 ; v1@3035.86,4965.2 P3.13 ; P3.11 3035.86,4925.83 v1(3035.86,4955.77) ; P3.14 3035.86,4984.89 v1(3035.86,4955.77)
RESET: P2.6 P3.2 P4.6 U4.6 | length 5020.9
  Top Layer w10: v1(1785.86,3992) 1785.86,3152 1885.86,3052 2405.86,3052 2435.86,3082 U4.6 ; v1(2935.86,3992) v1(2935.86,4332) v1(2935.86,4722)
  Bottom Layer w10: P4.6 1805.86,4642 1775.86,4612 1775.86,4002 v1(1785.86,3992) v1(2935.86,3992) ; P2.6@2330.76,4325.4 2542.47,4325.4 2555.86,4312 2625.86,4312 2645.86,4332 v1(2935.86,4332) ; v1(2935.86,4722) 2985.86,4722 3012.56,4748.7 P3.2@3146.36,4748.7
SCK: P1.5 P6.5 R13.1 U1.3-1 | length 2296.1
  Top Layer w10: P1.5 4645.86,2692 4839.66,2692 4924.19,2607.47 P6.5 ; 4805.86,2692 R13.1 ; P6.5 5080.36,2607.5 5085.86,2602 5145.86,2602 5165.86,2622 5385.86,2622 5595.86,2832 5595.86,3802 5555.86,3842 5520.86,3842 U1.3-1
SCLK0: U1.4-6 U3.6 | length 691.8
  Top Layer w10: U1.4-6 4515.86,4102 4545.86,4132 4745.86,4132 4770.86,4107 U3.6
SCLK1: P2.9 P3.3 P4.9 U4.14 | length 5107.3
  Top Layer w10: v1(2895.86,5382) 2895.86,4912 2975.86,4832 v1(2975.86,4768.35) ; v1@2975.86,4415.65 v1(2975.86,4768.35) ; v1(3185.86,4412) 3185.86,3192 U4.14
  Bottom Layer w10: P4.9 1885.86,4892 1805.86,4892 1775.86,4922 1775.86,5332 1825.86,5382 v1(2895.86,5382) v1@2895.86,5379.1 ; P2.9@2330.76,4384.5 2538.36,4384.5 2545.86,4392 2625.86,4392 2635.86,4382 2805.86,4382 2835.86,4412 v1(2975.86,4412) v1(3185.86,4412) ; v1(2975.86,4768.35) P3.3 P3.3@3171.51,4768.35
SD0: P1.7 P6.7 R12.1 U1.3-2 | length 2543.9
  Top Layer w10: P1.7 4645.86,2612 4762.76,2612 R12.1@4822.76,2552 ; R12.1@4822.79,2552 R12.1 4835.86,2552 4866.96,2520.9 P6.7 ; P6.7 5247,2520.86 5255.86,2512 5335.86,2512 5615.86,2797 5615.86,3852 5575.86,3892 5470.86,3892 U1.3-2
SD1: P1.8 P6.8 R11.1 U1.3-3 | length 2510.8
  Top Layer w10: P1.8 4635.86,2402 4765.86,2402 4815.86,2452 R11.1@4822.76,2452 ; R11.1 4822.79,2452 4839.71,2452 4865.26,2477.55 P6.8@5006.38,2477.55 ; P6.8@5006.36,2477.5 5341.36,2477.5 5645.86,2772 5645.86,3882 5590.86,3937 U1.3-3
SD2: P1.1 P6.1 R16.1 U1.3-4 | length 1935.6
  Top Layer w10: P1.1 4635.86,3102 4755.86,3102 R16.1 ; R16.1@4822.79,3152 R16.1 ; v1(4835.86,3152) R16.1 ; P6.1 4956.76,2780.98 4935.86,2802.11 v1(4935.86,3152) 4935.86,3362 5165.86,3592 5165.86,3882 5215.86,3932 5410.86,3932 U1.3-4
  Bottom Layer w10: v1(4835.86,3152) v1(4935.86,3152)
SD3: P1.2 P6.2 R15.1 U1.3-5 | length 2207
  Top Layer w10: P1.2 4635.86,3002 4755.06,3002 R15.1 ; v1(4839.66,3052) R15.1 ; v1(4839.66,3052) 4822.79,3052 R15.1 ; 4949.12,2737.39 P6.2 ; 4949.16,2737.4 4905.86,2780.7 v1(4905.86,3052) 4905.86,3402 5065.86,3562 5065.86,3902 5145.86,3982 5455.86,3982 5510.86,4037 U1.3-5
  Bottom Layer w10: v1(4839.66,3052) v1(4905.86,3052)
U1_1-1: U1.1-1
U1_1-2: U1.1-2
U1_1-3: U1.1-3
U1_1-4: U1.1-4
U1_1-5: U1.1-5
U1_1-6: U1.1-6
U1_1-7: U1.1-7
U1_1-9: U1.1-9
U1_1-10: U1.1-10
U1_1-12: U1.1-12
U1_1-14: U1.1-14
U1_1-15: U1.1-15
U1_1-16: U1.1-16
U1_1-17: U1.1-17
U1_1-19: U1.1-19
U1_1-20: U1.1-20
U1_1-22: U1.1-22
U1_2-1: U1.2-1
U1_2-2: U1.2-2
U1_2-6: U1.2-6
U1_2-13: U1.2-13
U1_2-14: U1.2-14
U1_2-15: U1.2-15
U1_2-16: U1.2-16
U1_2-17: U1.2-17
U1_2-18: U1.2-18
U1_2-19: U1.2-19
U1_2-20: U1.2-20
U1_2-22: U1.2-22
U1_3-7: U1.3-7
U1_3-8: U1.3-8
U1_3-9: U1.3-9
U1_3-11: U1.3-11
U1_3-12: U1.3-12
U1_3-13: U1.3-13
U1_3-14: U1.3-14
U1_3-15: U1.3-15
U1_3-17: U1.3-17
U1_3-18: U1.3-18
U1_3-19: U1.3-19
U1_3-20: U1.3-20
U1_3-21: U1.3-21
U1_3-22: U1.3-22
U1_4-1: U1.4-1
U1_4-2: U1.4-2
U1_4-4: U1.4-4
U1_4-9: U1.4-9
U1_4-10: U1.4-10
U1_4-11: U1.4-11
U1_4-12: U1.4-12
U1_4-13: U1.4-13
U1_4-17: U1.4-17
U1_4-18: U1.4-18
U1_4-19: U1.4-19
U1_4-20: U1.4-20
U1_4-22: U1.4-22
U4_1: U4.1
U4_2: U4.2
U4_4: U4.4
U4_5: U4.5
U4_9: U4.9
U4_10: U4.10
U4_16: U4.16
U4_19: U4.19
U4_20: U4.20
U4_21: U4.21
U4_22: U4.22
U4_24: U4.24
U4_25: U4.25
U4_26: U4.26
U4_27: U4.27
U4_29: U4.29
U4_30: U4.30
U4_31: U4.31
U4_32: U4.32
U4_34: U4.34
U4_35: U4.35
U4_36: U4.36
U4_37: U4.37
U4_40: U4.40
U4_41: U4.41
U4_42: U4.42
U4_43: U4.43
U4_44: U4.44
VHIGH: C1.1 JP1.4 pad.2@3775.86,3922 pad.2@4615.86,3502 U1.2-4 U2.3 U4.39 | length 4944.6
  Top Layer w10: 4055.86,4782 4170.86,4782 U1.2-4
  Top Layer w30: 4055.86,4782 3825.86,4782 3775.86,4732 3775.86,3922 3875.86,3922 3905.86,3892 3905.86,3502 v2(4010.86,3397) C1.1 4511.56,3397 pad.2@4615.86,3502
  Bottom Layer w30: U4.39 2115.86,3922 pad.2@3775.86,3922 ; pad.2@4615.86,3502 4920.86,3502 JP1.4
XCD: P1.9 P6.9 R10.1 | length 521.9
  Top Layer w10: P1.9 4645.86,2292 4775.86,2292 4805.86,2322 R10.1 4835.86,2352 4918.07,2434.2 4949.16,2434.2 ; 4949.12,2434.24 P6.9
XCS0: R1.1 U1.4-5 U3.1 | length 1336.6
  Top Layer w10: U3.1 4865.86,4335.98 v1(4865.86,4432) 4915.86,4432 4935.86,4452 R1.1
  Bottom Layer w10: U1.4-5 4565.86,3687 4565.86,4392 4605.86,4432 v1(4865.86,4432)
XRST: C4.1 R19.1 S5.2 U1.2-8 | length 4151.9
  Top Layer w10: S5.2 5105.86,1862 R19.1 5175.86,1972 5285.86,2082 C4.1
  Bottom Layer w10: U1.2-8 4215.86,4542 4275.86,4542 4325.86,4492 4325.86,4242 4275.86,4192 4095.86,4192 4035.86,4132 4035.86,3602 4325.86,3312 4325.86,2442 4495.86,2272 4865.86,2272 4925.86,2212 4925.86,2132 4975.86,2082 C4.1
pads on no net: P2.15 P2.16 P2.17 P3.0 P6. P6.10 P6.11 P6.GND S1.3 S1.4 S2.3 S2.4 S3.3 S3.4 S4.3 S4.4 S5.3 S5.4
copper on no net:
  other v3: 1932.71,1701.85 5476.01,1701.85 1932.71,5245.15 5476.01,5245.15

## Polygon pours and split planes (outlines as drawn)
GND on Bottom Layer (solid): 1735.86,5442 1735.86,1512 1745.86,1502 5675.86,1502 5675.86,5442 1735.86,5442
GND on Top Layer (solid): 1735.86,5442 1735.86,1502 5675.86,1502 5675.86,5442 1735.86,5442

## Silkscreen, mask and mechanical layers (free items; w line width, h text height)
Top Overlay:
  text "JLCJLCJLCJLC" at 4995.86,3784.5 h35
  text "+3V3" at 4135.86,3404.5 h35
  text "+5V TX RX GND" at 5045.86,3369.5 h35
  text "VHIGH" at 3955.86,3304.5 h35
  text "VS1005" at 5455.86,3269.5 h35
  text "VS1005BOB MCU Board" at 2305.86,3264.5 h35
  text "VER 0.1 2024-02" at 2305.86,3204.5 h35
  text "+5V TX RX GND" at 5445.86,3174.5 h35 r180
  text "RP2040" at 5455.86,3164.5 h35
  text "GND" at 4355.86,2754.5 h35
  text "IOVDD" at 5035.86,2214.5 h35
  text "GND" at 5445.86,2214.5 h35

## Text inside footprints (layer, text, board x,y; h text height)
P2: Bottom Overlay "1" at 2462.25,4138.1 h59.05 r270; Bottom Overlay "14" at 2461.34,4507 h59.05 r270
P3: Bottom Overlay "1" at 3190.86,4702 h30 r90; Bottom Overlay "18" at 3190.86,5127 h30 r90